# EAGLE board LilyTiny_PT (EAGLE 6.0)

Size 137.16 x 54.61 mm. Coordinates in mm from the lower left corner, seen from the top.
Outline: 2.54,0 arc-90 0,2.54 0,52.07 arc-90 2.54,54.61 134.62,54.61 arc-90 137.16,52.07 137.16,36.07 arc-90 134.62,33.53 120.65,33.53 arc-90 118.11,36.07 118.11,48.26 arc90 115.57,50.8 105.41,50.8 arc90 102.87,48.26 102.87,36.07 arc-90 100.33,33.53 arc-90 97.79,36.07 97.79,48.26 arc90 95.25,50.8 85.09,50.8 arc90 82.55,48.26 82.55,36.07 arc-90 80.01,33.53 arc-90 77.47,36.07 77.47,48.26 arc90 74.93,50.8 64.77,50.8 arc90 62.23,48.26 62.23,36.07 arc-90 59.69,33.53 arc-90 57.15,36.07 57.15,48.26 arc90 54.61,50.8 44.45,50.8 arc90 41.91,48.26 41.91,36.07 arc-90 39.37,33.53 arc-90 36.83,36.07 36.83,48.26 arc90 34.29,50.8 24.13,50.8 arc90 21.59,48.26 21.59,36.07 arc-90 19.05,33.53 arc90 16.51,30.99 16.51,25.4 arc90 19.05,22.35 arc-90 21.59,19.81 21.59,7.62 arc90 24.13,5.08 34.29,5.08 arc90 36.83,7.62 36.83,19.81 arc-90 39.37,22.35 arc-90 41.91,19.81 41.91,7.62 arc90 44.45,5.08 54.61,5.08 arc90 57.15,7.62 57.15,19.81 arc-90 59.69,22.35 arc-90 62.23,19.81 62.23,7.62 arc90 64.77,5.08 74.93,5.08 arc90 77.47,7.62 77.47,19.81 arc-90 80.01,22.35 arc-90 82.55,19.81 82.55,7.62 arc90 85.09,5.08 95.25,5.08 arc90 97.79,7.62 97.79,19.81 arc-90 100.33,22.35 arc-90 102.87,19.81 102.87,7.62 arc90 105.41,5.08 115.57,5.08 arc90 118.11,7.62 118.11,10.16 arc-90 120.65,12.7 134.62,12.7 arc-90 137.16,10.16 137.16,2.54 arc-90 134.62,0 2.54,0
Copper layers (1*16): Top 0.035mm / dielectric 1.5mm / Bottom 0.035mm
Design rules: minimum track width 12mil, minimum drill 20mil, track to track 8mil, track to pad 8mil, pad to pad 8mil, via to via 8mil, smd to smd 8mil, copper to edge 8mil, drill to drill 8mil, minimum pad ring 12mil, minimum via ring 10mil, stop-mask expansion 4mil, vias tented up to drill 20mil, thermal gap 10mil

## Footprints (pad centres in the part's own frame; a part is rotated, then mirrored left to right if it is on the bottom)
STAND-OFF-TIGHT = hole 3.048: 0,0

## Placement (x,y rotation side)
JP3  STAND-OFFTIGHT  [STAND-OFF-TIGHT]  3.81,3.81 0 top
JP7  STAND-OFFTIGHT  [STAND-OFF-TIGHT]  133.35,50.8 0 top
JP9  STAND-OFFTIGHT  [STAND-OFF-TIGHT]  133.35,3.81 0 top
JP10  STAND-OFFTIGHT  [STAND-OFF-TIGHT]  3.81,50.8 0 top

## Library data of the parts
JP3 JP7 JP9 JP10 = SparkFun

## Text on the board
tPlace: #338 | LilyPad MiniFade | LilyPad MiniFade | #338